# Altium PCB prosthesis.PcbDoc (part 2 of 2)
Units mm, origin at the board's own origin, x right, y up, seen from the top; angles counter-clockwise.
Board outline 54.59 x 41.87 mm, 4 copper layers (Top Layer, Layer 1, Layer 2, Bottom Layer), stack 1.575 mm thick; 80 components, 84 nets, 363 pads, 186 vias.
Unrouted connection lines stored in the file: 115.
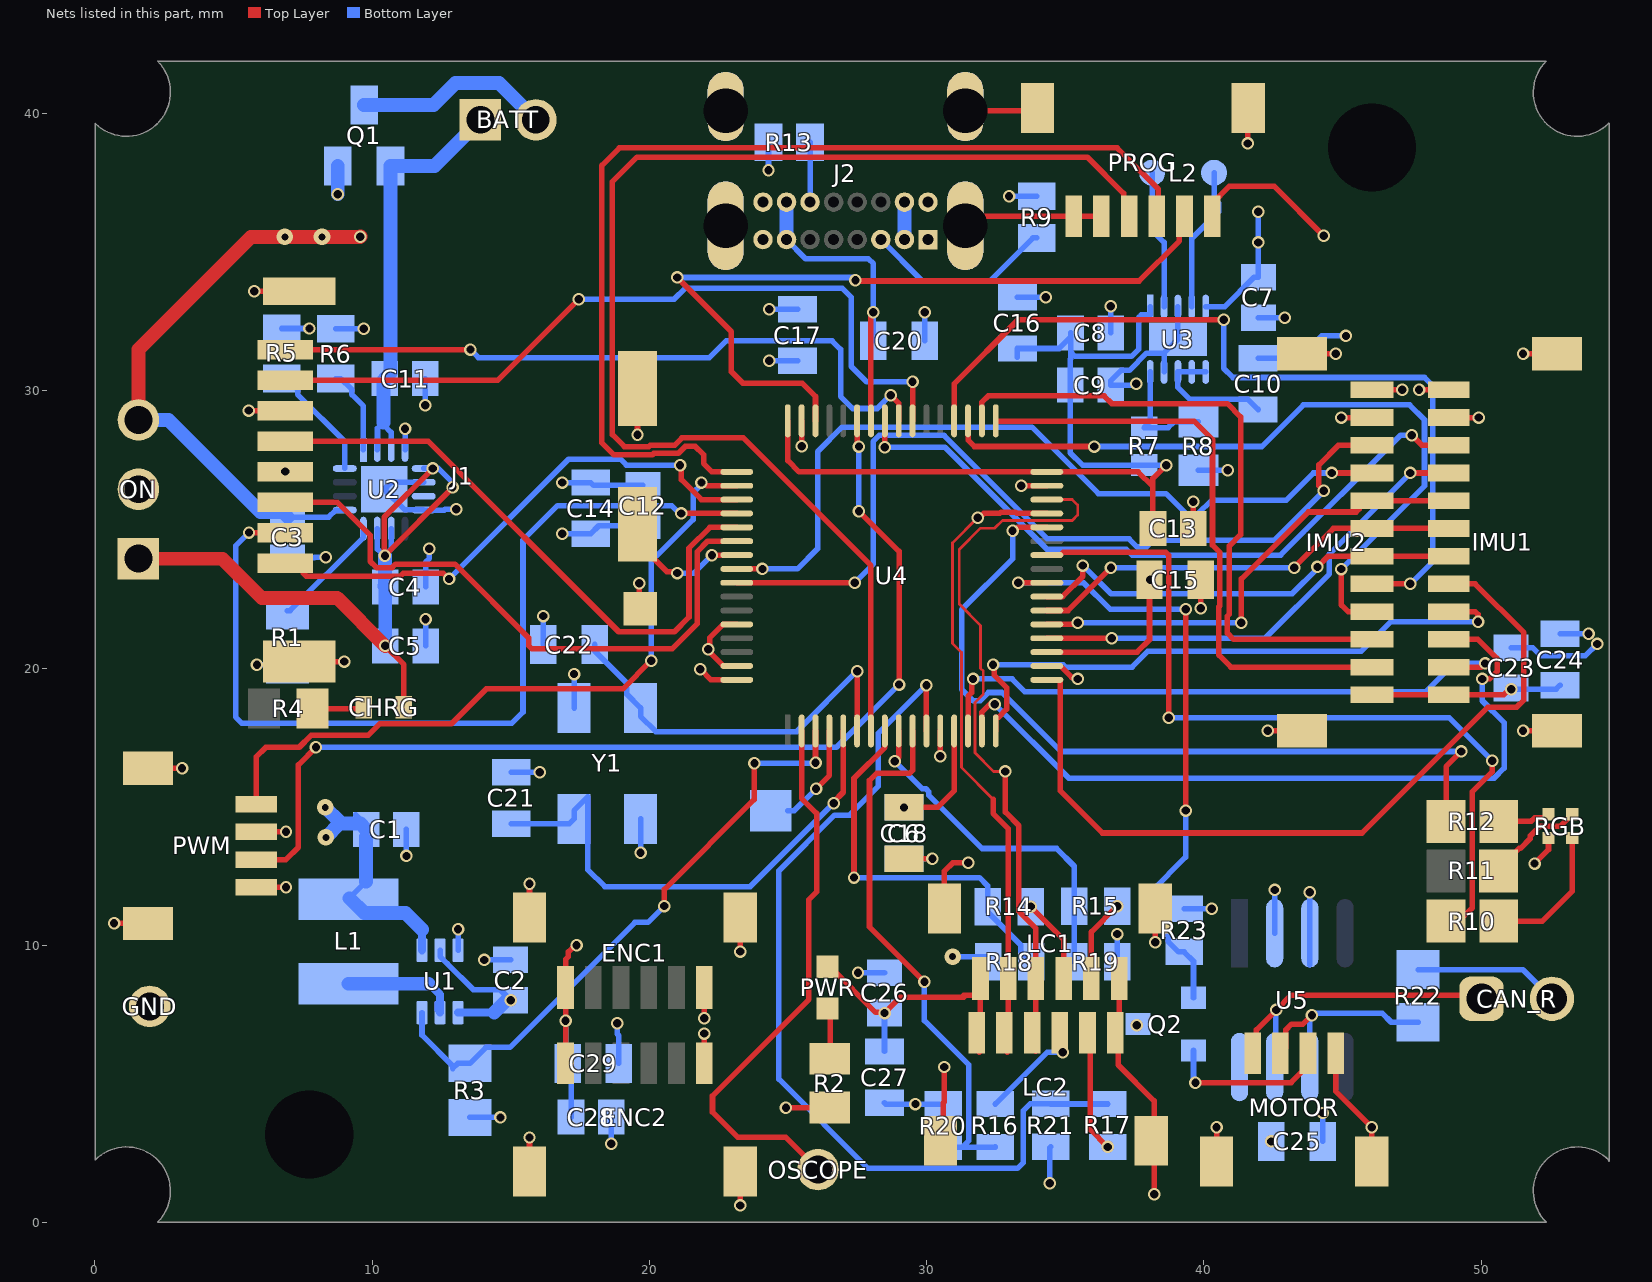
[diagram p4: the nets of this part, all layers, seen from the top]

## Via types
v1: diameter 0.45, hole 0.3, Top Layer to Bottom Layer, 181 vias
v2: diameter 0.6/0.6 (per signal layer), hole 0.25, Top Layer to Bottom Layer, 5 vias

## Nets (pads, with @x,y where several pads share a name; then routed paths per layer and width w, separated by ;. In a path a pad name is that pad's centre, name@x,y a point inside that pad or via, vN(x,y) a via of type N, cw(c..) or ccw(c..) an arc to the next point about the centre after c; other vN are vias at no path point) (continued)
GND: C1.2 C2.2 C3.2 C4.2 C5.2 C6.2 C7.2 C8.2 C9.2 C10.1 C11.2 C12.2 C13.2 C14.2 C15.2 C16.2 C17.2 C18.2 C20.2 C21.1 C22.2 C23.2 C24.2 C25.2 C26.2 C27.2 C28.2 C29.2 ENC1.6 ENC1.7 ENC1.8 ENC2.6 ENC2.7 ENC2.8 GND.1 IMU1.11 IMU1.12 IMU1.S1 IMU1.S2 IMU2.11 IMU2.12 IMU2.13 IMU2.14 J1.6 J1.9 J1.11 J1.12 J1.13 J2.1 J2.2 J2.3 J2.4 J2.A1 J2.A12 J2.B1 J2.B12 LC1.6 LC1.7 LC1.8 LC2.6 LC2.7 LC2.8 MOTOR.4 MOTOR.S1 MOTOR.S2 PROG.5 PROG.6 PROG.7 PROG.8 PWM.2 PWM.4 PWM.5 PWM.6 Q1.3 R1.2 R2.1 R3.1 R5.1 R6.1 R8.1 R9.2 R13.2 R18.1 R19.1 R20.1 R21.1 R23.1 U1.3 U2.4 U2.6 U2.8 U2.17 U3.3 U3.9 U3.11 U4.12 U4.18 U4.31 U4.47 U4.60 U4.63 U5.2 Y1.2 Y1.4 | length 130.9
  Top Layer w0.2: v1(0.696,10.793) PWM.6@1.921,10.793 ; PWM.5@1.921,16.393 v1(3.146,16.393) ; v1(5.548,29.287) J1.6@6.873,29.287 ; v1(5.748,33.587) J1.12@7.373,33.587 ; PWM.4@5.821,12.093 v1(6.896,12.093) ; PWM.2@5.821,14.093 v1(6.896,14.093) ; J1.13@7.373,20.237 v1(8.998,20.237) ; ENC2.7@15.678,1.846 v1(15.678,3.071) ; ENC1.8@15.678,11.002 v1(15.678,12.227) ; v1(19.573,28.412) J1.9@19.573,30.087 ; v1(19.641,23.062) 19.641,22.169 J1.11@19.673,22.137 ; ENC2.6@21.979,5.746 v1(21.979,6.821) ; v1(21.979,7.377) ENC1.6@21.979,8.477 ; U4.63@23.152,20.077 22.667,20.077 22.13,20.614 v1(22.13,20.677) 22.177,20.725 22.177,21.09 22.664,21.577 U4.60@23.152,21.577 ; v1(23.278,0.621) ENC2.8@23.278,1.846 ; v1(23.278,9.777) ENC1.7@23.278,11.002 ; v1(24.927,4.15) R2.1@26.51,4.15 ; v1(25.493,27.999) U4.47@25.493,28.918 ; C6.2@29.185,13.125 v1(30.21,13.125) ; v1(30.493,16.816) U4.12@30.493,17.735 ; LC2.7@30.604,2.244 30.604,4.323 30.632,4.351 v1(30.632,5.614) ; LC1.8@30.642,11.333 30.642,12.675 30.942,12.976 v1(31.496,12.976) ; J2.1@31.393,35.953 31.393,36.064 31.624,36.295 PROG.6@35.301,36.295 PROG.5@36.301,36.295 ; J2.3@31.393,40.103 33.909,40.103 PROG.8@34.001,40.195 ; v1(33.415,26.577) U4.31@34.334,26.577 ; U4.18@34.334,20.077 34.822,20.077 35.242,19.657 35.399,19.657 v1(35.446,19.609) ; LC1.6@36.942,8.808 36.942,6.181 36.905,6.144 36.905,5.694 38.205,4.394 v1(38.205,1.019) ; v1(38.242,10.108) LC1.7@38.242,11.333 ; C13.2@39.617,25.04 v1(39.617,25.996) ; v1(39.888,22.161) C15.2@39.888,23.186 ; MOTOR.S2@40.456,2.211 v1(40.456,3.436) ; v1(41.577,38.92) 41.577,40.171 PROG.7@41.601,40.195 ; v1(42.306,17.736) IMU2.14@43.531,17.736 ; IMU2.13@43.531,31.336 v1(44.756,31.336) ; MOTOR.4@44.756,6.111 44.756,4.736 v1(46.056,3.436) MOTOR.S1@46.056,2.211 ; v1(44.956,29.036) IMU2.11@46.056,29.036 ; IMU2.12@46.056,30.036 v1(47.156,30.036) ; v1(47.759,30.036) IMU1.12@48.834,30.036 ; IMU1.11@48.834,29.036 v1(49.909,29.036) ; v1(51.509,17.736) IMU1.S2@52.734,17.736 ; v1(51.509,31.336) IMU1.S1@52.734,31.336
  Bottom Layer w0.2: v1(5.848,20.12) R1.2@6.948,20.12 ; R5.1@6.743,32.247 v1(7.743,32.247) ; C3.2@6.96,23.987 7.912,23.987 7.928,24.003 v1(8.333,24.003) ; R6.1@8.695,32.242 v1(9.695,32.242) ; U2.4@11.189,27.872 v1(11.189,28.63) ; v1(11.239,13.226) C1.2@11.239,14.182 ; U2.6@11.862,26.699 10.689,26.699 U2.17@10.439,26.449 11.182,25.707 11.855,25.707 U2.8@11.862,25.699 12.609,25.699 12.64,25.73 v1(13.038,25.73) ; v1(11.92,29.482) C11.2@11.92,30.439 ; C5.2@11.929,20.803 v1(11.929,21.759) ; C4.2@11.929,22.926 11.929,23.819 12.065,23.955 v1(12.065,24.3) ; U1.3@13.102,9.828 v1(13.102,10.578) ; R3.1@13.531,3.794 v1(14.631,3.794) ; v1(14.046,9.475) C2.2@15.002,9.475 ; C21.1@15.02,16.24 v1(16.045,16.24) ; C22.2@16.179,20.85 v1(16.179,21.875) ; v1(16.859,24.841) C14.2@17.884,24.841 18.176,25.133 C12.2@19.765,25.133 ; Y1.2@17.285,18.561 v1(17.285,19.786) ; v1(18.63,2.852) C28.2@18.63,3.808 ; v1(18.84,7.186) 18.84,6.804 18.902,6.742 C29.2@18.902,5.744 ; v1(19.685,13.336) Y1.4@19.685,14.561 ; v1(24.298,37.958) R13.2@24.298,38.958 ; v1(24.323,32.937) C17.2@25.348,32.937 ; v1(27.525,9.015) C26.2@28.481,9.015 ; C27.2@28.481,4.325 28.529,4.277 v1(29.597,4.277) R20.1@30.597,4.277 ; C18.2@29.185,13.125 v1(30.21,13.125) ; C20.2@29.928,31.805 v1(29.928,32.83) ; v2(30.937,9.594) R18.1@32.226,9.594 ; R18.1@32.226,9.408 R18.1@32.226,9.594 ; v1(32.973,37.013) R9.2@33.973,37.013 ; C16.2@33.275,33.376 v1(34.3,33.376) ; v1(34.442,1.419) 34.442,2.707 R21.1@34.47,2.735 ; C8.2@36.644,32.088 v1(36.644,33.044) ; R19.1@36.875,9.408 v1(36.875,10.408) ; v1(37.563,30.251) 37.519,30.208 C9.2@36.635,30.208 36.635,30.36 37.013,30.739 37.31,30.739 37.931,31.36 U3.11@38.562,31.36 ; U3.9@38.563,30.682 U3.11@38.563,31.36 ; U3.3@39.062,33.038 U3.11@39.062,31.86 U3.11@38.563,31.36 ; R23.1@39.286,11.316 v1(40.286,11.316) ; R8.1@39.804,27.134 v1(40.854,27.134) ; C10.1@41.952,31.176 43.444,31.176 44.246,31.979 v1(45.122,31.979) ; C7.2@41.962,32.64 v1(42.918,32.64) ; U5.2@42.552,10.439 v1(42.552,11.998) ; C25.2@44.283,2.93 v1(44.283,3.955) ; C23.2@51.084,20.736 51.856,20.736 52.145,20.447 53.759,20.447 v1(54.184,20.872) ; C24.2@52.847,21.234 v1(53.873,21.234) ; R18.1@32.226,9.594 32.24,9.594 32.226,9.608 R18.1@32.226,9.594
  Bottom Layer w0.5: v1(8.764,37.087) Q1.3@8.764,38.112
GRN: R10.1 U4.26 | length 29.4
  Top Layer w0.2: U4.26@34.334,24.077 34.826,24.077 34.93,24.181 38.618,24.181 38.735,24.064 v1(38.735,18.212) ; R10.1@48.736,10.875 49.2,10.875 49.682,11.357 49.682,15.545 50.394,16.256 v1(50.394,16.662)
  Bottom Layer w0.2: v1(38.735,18.212) 48.844,18.212 v1(50.394,16.662)
IMU0_BT: IMU1.2 U4.14 | length 22.4
  Top Layer w0.2: U4.14@31.493,17.735 31.493,18.984 31.626,19.117 31.626,19.561 v1(31.674,19.609) ; IMU1.2@48.834,20.036 50.008,20.036 v1(50.14,20.168)
  Bottom Layer w0.2: v1(31.674,19.609) 33.08,19.609 33.537,19.152 48.006,19.152 49.022,20.168 v1(50.14,20.168)
IMU0_CS: IMU1.9 U4.20 | length 17.4
  Top Layer w0.2: U4.20@34.334,21.077 v1(36.672,21.077) ; v1(47.447,27.036) IMU1.9@48.834,27.036
  Bottom Layer w0.2: v1(36.672,21.077) 42.207,21.077 44.526,23.396 44.526,24.115 v1(47.447,27.036)
IMU0_INT: IMU1.10 U4.41 | length 24.8
  Top Layer w0.2: v1(28.493,27.965) U4.41@28.493,28.918 ; v1(47.498,28.397) 47.859,28.036 IMU1.10@48.834,28.036
  Bottom Layer w0.2: v1(28.493,27.965) 30.656,27.965 34.335,24.287 37.196,24.287 37.41,24.073 42.767,24.073 47.092,28.397 v1(47.498,28.397)
IMU0_P0: IMU1.3 U4.15 | length 27.6
  Top Layer w0.2: U4.15@31.993,17.735 31.993,18.415 32.273,18.694 v1(32.461,18.694) ; IMU1.3@48.834,21.036 49.88,21.036 50.571,20.345 50.571,19.878 50.302,19.609 v1(50.038,19.609)
  Bottom Layer w0.2: v1(32.461,18.694) 35.128,16.027 50.463,16.027 50.825,16.39 50.825,18.034 50.038,18.821 v1(50.038,19.609)
IMU0_P1: IMU1.4 U4.16 | length 22.4
  Top Layer w0.2: v1(32.395,20.125) 32.443,20.077 32.443,19.738 32.886,19.295 32.886,18.518 32.594,18.226 32.499,18.226 32.493,18.22 U4.16@32.493,17.735 ; IMU1.4@48.834,22.036 49.784,22.036 49.886,21.935 v1(49.886,21.666)
  Bottom Layer w0.2: v1(32.395,20.125) 34.923,20.125 35.012,20.036 37.41,20.036 37.973,20.599 45.669,20.599 46.736,21.666 v1(49.886,21.666)
IMU0_RST: IMU1.5 U4.17 | length 29.7
  Top Layer w0.2: U4.17@34.334,19.577 34.823,19.577 34.823,15.57 36.341,14.053 45.701,14.053 50.241,18.593 51.283,18.593 51.537,18.847 51.537,21.284 49.784,23.036 IMU1.5@48.834,23.036
IMU1_BT: IMU2.2 U4.33 | length 21.7
  Top Layer w0.2: U4.33@32.493,28.918 32.493,28.905 39.649,28.905 40.31,28.245 40.31,24.435 40.564,24.181 40.564,22.239 40.538,22.214 40.538,20.472 40.974,20.036 IMU2.2@46.056,20.036
IMU1_CS: IMU2.9 U4.56 | length 29
  Top Layer w0.2: U4.56@23.152,23.577 v1(24.079,23.577) ; v1(44.613,27.036) IMU2.9@46.056,27.036
  Bottom Layer w0.2: v1(24.079,23.577) 25.339,23.577 26.073,24.311 26.073,27.812 26.951,28.69 33.794,28.69 36.195,26.289 38.633,26.289 39.37,25.552 39.776,25.552 40.284,26.06 42.972,26.06 43.948,27.036 v1(44.613,27.036)
IMU1_INT: IMU2.10 U4.57 | length 31.7
  Top Layer w0.2: U4.57@23.152,23.077 v1(27.407,23.077) ; v1(44.323,26.391) 44.145,26.568 44.145,27.33 44.851,28.036 IMU2.10@46.056,28.036
  Bottom Layer w0.2: v1(27.407,23.077) 28.067,23.737 28.067,28.169 28.289,28.39 30.627,28.39 34.354,24.663 37.301,24.663 37.592,24.373 37.934,24.373 38.176,24.615 42.547,24.615 v1(44.323,26.391)
IMU1_P0: IMU2.3 U4.34 | length 23.7
  Top Layer w0.2: U4.34@31.993,28.918 31.993,29.591 32.222,29.82 36.398,29.82 36.678,29.54 40.843,29.54 41.326,29.058 41.326,24.816 40.919,24.409 40.919,21.946 40.85,21.876 40.85,21.26 41.073,21.036 IMU2.3@46.056,21.036
IMU1_P1: IMU2.4 U4.35 | length 27.2
  Top Layer w0.2: U4.35@31.493,28.918 31.493,28.222 31.725,27.991 v1(36.043,27.991) ; v1(44.958,23.571) 44.958,22.276 45.197,22.036 IMU2.4@46.056,22.036
  Bottom Layer w0.2: v1(36.043,27.991) 42.088,27.991 43.586,29.489 47.422,29.489 47.955,28.956 47.955,26.568 v1(44.958,23.571)
IMU1_RST: IMU2.5 U4.36 | length 30.4
  Top Layer w0.2: U4.36@30.993,28.918 30.993,30.251 33.305,32.563 v1(40.716,32.563) ; IMU2.5@46.056,23.036 v1(47.447,23.036)
  Bottom Layer w0.2: v1(40.716,32.563) 40.716,30.81 41.046,30.48 47.955,30.48 48.26,30.175 48.26,23.849 v1(47.447,23.036)
IMU_MISO: IMU1.7 IMU2.7 U4.22 | length 15.7
  Top Layer w0.2: U4.22@34.334,22.077 35.103,22.077 v1(36.648,23.622) ; v1(43.256,23.622) 44.671,25.036 IMU2.7@46.056,25.036 IMU1.7@48.834,25.036
  Bottom Layer w0.2: v1(36.648,23.622) v1(43.256,23.622)
IMU_MOSI: IMU1.6 IMU2.6 U4.23 | length 16.2
  Top Layer w0.2: U4.23@34.334,22.577 34.9,22.577 35.636,23.313 v1(35.636,23.698) ; v1(44.094,23.647) 44.483,24.036 IMU2.6@46.056,24.036 IMU1.6@48.834,24.036
  Bottom Layer w0.2: v1(35.636,23.698) 36.652,22.682 43.183,22.682 44.094,23.593 v1(44.094,23.647)
IMU_SCL: IMU1.8 IMU2.8 U4.21 | length 17.4
  Top Layer w0.2: U4.21@34.334,21.577 35.382,21.577 v1(35.446,21.641) ; v1(41.351,21.641) 41.351,23.216 43.765,25.63 45.493,25.63 45.593,25.73 45.593,26.036 IMU2.8@46.056,26.036 IMU1.8@48.834,26.036
  Bottom Layer w0.2: v1(35.446,21.641) v1(41.351,21.641)
LC1_A0: LC1.4 R14.2 | length 3.1
  Top Layer w0.2: v1(33.753,11.401) 34.942,10.213 LC1.4@34.942,8.808
LC1_A0_D2: R14.1 R18.2 U4.8 | length 14.1
  Top Layer w0.2: v1(27.381,12.446) 27.381,16.027 28.493,17.139 U4.8@28.493,17.735
  Bottom Layer w0.2: v1(27.381,12.446) 31.902,12.446 32.203,12.145 R14.1@32.203,11.401 32.203,11.201 33.401,10.004 33.401,9.783 R18.2@33.776,9.408
LC1_A1: LC1.5 R15.2 | length 3
  Top Layer w0.2: LC1.5@35.942,8.808 35.942,10.483 v1(36.873,11.415)
LC1_A1_D2: R15.1 R19.2 U4.9 | length 12.7
  Top Layer w0.2: v1(28.854,16.637) 28.993,16.776 U4.9@28.993,17.735
  Bottom Layer w0.2: v1(28.854,16.637) 29.841,15.65 29.967,15.65 30.085,15.533 30.085,15.407 31.998,13.493 34.685,13.493 35.323,12.855 R15.1@35.323,11.415 R19.2@35.325,9.408 R19.2@35.325,9.408
LC2_A0: LC2.4 R16.2 | length 3.2
  Bottom Layer w0.2: R16.2@32.48,4.28 34.345,6.144 v1(34.905,6.144)
LC2_A0_D2: R16.1 R20.2 U4.10 | length 19.8
  Top Layer w0.2: U4.10@29.493,17.735 29.493,16.31 29.388,16.205 28.194,16.205 27.94,15.951 27.94,10.668 v1(29.921,8.687)
  Bottom Layer w0.2: v1(29.921,8.687) 29.921,7.29 31.521,5.69 31.521,2.956 31.293,2.727 ; R20.2@30.597,2.727 31.293,2.727 ; R16.1@32.48,2.73 32.477,2.727 31.293,2.727
LC2_A1: LC2.5 R17.2 | length 3.7
  Top Layer w0.2: LC2.5@35.905,6.144 35.905,3.355 v1(36.53,2.73)
LC2_A1_D2: R17.1 R21.2 U4.11 | length 33.6
  Top Layer w0.2: U4.11@29.993,17.735 v1(29.993,19.383)
  Bottom Layer w0.2: v1(29.993,19.383) 28.261,17.652 28.261,15.741 27.22,14.7 26.68,14.7 24.67,12.69 24.67,5.175 27.889,1.956 33.274,1.956 33.477,2.159 33.477,4.031 33.731,4.285 R21.2@34.47,4.285 34.474,4.28 R17.1@36.53,4.28
NetBATT1_1: BATT.1 C11.1 Q1.1 U2.2 U2.3 | length 15
  Bottom Layer w0.2: U2.2@10.189,27.872 10.189,28.148 10.197,28.155 10.197,28.221 10.197,28.647 10.326,28.776 ; 10.407,28.787 10.689,28.504 U2.3@10.689,28.271 ; 10.407,28.855 10.474,28.855 ; C11.1@10.466,30.439 C11.1@10.664,30.637
  Bottom Layer w0.5: 10.407,28.855 10.407,30.379 C11.1@10.466,30.439 ; C11.1@10.664,30.637 Q1.1@10.664,38.112 12.249,38.112 BATT.1@13.908,39.771
NetBATT1_2: BATT.2 Q1.2 | length 7.1
  Bottom Layer w0.5: Q1.2@9.714,40.312 12.223,40.312 13.008,41.097 14.582,41.097 BATT.2@15.908,39.771
NetC4_1: C4.1 C5.1 CHRG.1 ON.1 U2.5 U2.10 U2.11 | length 26.9
  Top Layer w0.2: v1(10.474,20.803) 11.149,20.128 CHRG.1@11.149,18.588 ; v1(12.193,27.199) 10.439,25.446 10.439,24.078 v1(10.466,24.052) 10.466,24.066 12.903,26.503 v1(12.903,26.518)
  Top Layer w0.5: ON.1@1.575,23.941 4.61,23.941 6.022,22.53 8.747,22.53 v1(10.474,20.803)
  Bottom Layer w0.2: U2.11@10.189,25.026 10.189,24.293 10.431,24.052 v1(10.466,24.052) 10.466,24.069 10.689,24.293 U2.10@10.689,25.026 ; C4.1@10.439,22.961 C4.1@10.474,22.926 ; U2.5@11.862,27.199 v1(12.193,27.199) 12.395,27.199 12.903,26.691 v1(12.903,26.518)
  Bottom Layer w0.5: C4.1@10.439,22.961 10.466,22.987 v1(10.466,24.052) ; v1(10.474,20.803) C4.1@10.474,22.926
NetC10_2: C10.2 U3.6 U3.7 U3.8 | length 4.8
  Bottom Layer w0.2: U3.6@40.062,30.682 U3.7@39.563,30.682 U3.8@39.062,30.682 39.062,30.121 39.482,29.701 41.577,29.701 C10.2@41.952,29.326
NetC21_2: C21.2 U4.5 Y1.1 | length 19.1
  Top Layer w0.2: v1(26.648,15.125) 26.648,15.178 26.993,15.523 U4.5@26.993,17.735
  Bottom Layer w0.2: C21.2@15.02,14.39 17.113,14.39 Y1.1@17.285,14.561 17.285,14.861 17.785,15.361 17.785,12.725 18.394,12.116 23.639,12.116 v1(26.648,15.125)
NetC22_1: C22.1 U4.6 Y1.3 | length 14.4
  Top Layer w0.2: U4.6@27.493,17.735 v1(27.493,19.888)
  Bottom Layer w0.2: C22.1@18.029,20.85 18.029,20.625 19.185,19.47 19.185,19.061 Y1.3@19.685,18.561 19.685,18.261 20.235,17.711 25.316,17.711 v1(27.493,19.888)
NetCHRG_2: CHRG.2 R4.2 | length 1.9
  Top Layer w0.2: R4.2@7.858,18.539 9.649,18.539 CHRG.2@9.699,18.588
NetJ2_A5: J2.A5 R9.1 | length 6.9
  Bottom Layer w0.2: J2.A5@28.348,35.453 29.841,33.96 32.283,33.96 33.836,35.513 R9.1@33.973,35.513
NetJ2_B5: J2.B5 R13.1 | length 2.2
  Bottom Layer w0.2: 25.798,37.872 R13.1@25.798,38.958 ; J2.B5@25.798,36.803 25.798,37.871
NetJ3_1: CAN_R.1 MOTOR.1 U5.7 | length 11.6
  Top Layer w0.1: MOTOR.1@41.756,6.111 MOTOR.1@41.896,6.251
  Top Layer w0.2: MOTOR.1@41.896,6.251 41.896,6.952 v1(42.614,7.671) 43.148,8.204 CAN_R.1@49.95,8.204
  Bottom Layer w0.1: U5.7@42.552,5.612 U5.7@42.583,5.643 ; v1@42.583,7.639 v1(42.614,7.671)
  Bottom Layer w0.2: U5.7@42.583,5.643 v1@42.583,7.639
NetJ3_2: CAN_R.2 R22.1 | length 5.3
  Bottom Layer w0.2: R22.1@47.725,9.128 51.499,9.128 CAN_R.2@52.553,8.075
NetL1_2: L1.2 U1.5 | length 4.5
  Bottom Layer w0.2: U1.5@12.352,7.906 12.352,7.678 U1.5@12.452,7.578
  Bottom Layer w0.3: 12.065,8.617 12.452,8.229 U1.5@12.452,7.578
  Bottom Layer w0.5: L1.2@9.155,8.617 12.039,8.617
NetL2_1: L2.1 U3.4 | length 5.3
  Bottom Layer w0.2: U3.4@39.563,33.038 39.563,35.497 40.529,36.463 40.529,36.763 40.366,36.926 L2.1@40.366,37.864
NetL2_2: L2.2 U3.2 | length 5
  Bottom Layer w0.2: L2.2@38.135,37.864 38.135,35.778 38.563,35.35 U3.2@38.563,33.038
NetMOTOR_2: MOTOR.2 R22.2 U5.6 | length 8
  Top Layer w0.2: MOTOR.2@42.756,6.111 42.956,6.311 42.956,6.956 43.159,7.159 43.569,7.159 v1(43.896,7.486)
  Bottom Layer w0.2: U5.6@43.822,5.612 43.822,7.412 v1(43.896,7.486) 43.97,7.56 46.425,7.56 46.757,7.228 R22.2@47.725,7.228
NetMOTOR_3: MOTOR.3 Q2.2 | length 6
  Top Layer w0.2: v1(39.695,5.049) 43.144,5.049 43.756,5.661 MOTOR.3@43.756,6.111
  Bottom Layer w0.2: Q2.2@39.624,6.209 39.624,5.119 v1(39.695,5.049)
NetOSC_1: OSCOPE.1 U4.2 | length 20.2
  Top Layer w0.2: U4.2@25.493,17.735 25.493,15.299 26.035,14.757 26.035,11.931 25.756,11.651 25.756,8.052 22.279,4.575 22.279,3.985 23.19,3.073 24.927,3.073 OSCOPE.1@26.086,1.915
NetPWR_1: PWR.1 R2.2 | length 2.4
  Top Layer w0.2: PWR.1@26.528,7.971 26.528,5.573 R2.2@26.535,5.566
NetR1_1: R1.1 U2.12 | length 4.2
  Bottom Layer w0.2: R1.1@6.948,22.07 7.048,22.07 9.689,24.711 U2.12@9.689,25.026
NetR5_2: R5.2 U2.16 | length 4.3
  Bottom Layer w0.2: R5.2@6.743,30.447 6.918,30.447 7.318,30.047 7.318,29.872 9.016,28.174 U2.16@9.016,27.199
NetR6_2: R6.2 U2.1 | length 3.1
  Bottom Layer w0.2: R6.2@8.695,30.442 8.87,30.442 9.27,30.042 9.27,29.867 9.689,29.447 U2.1@9.689,27.872
NetR7_1: R7.1 R8.2 U3.10 | length 4.2
  Bottom Layer w0.2: U3.10@38.062,30.682 38.062,28.888 R7.1@37.843,28.669 38.71,28.669 38.925,28.884 R8.2@39.804,28.884
NetR10_2: R10.2 RGB.4 | length 5
  Top Layer w0.2: R10.2@50.636,10.875 52.206,10.875 53.277,11.946 RGB.4@53.277,13.873
NetR11_2: R11.2 RGB.3 | length 3.6
  Top Layer w0.2: R11.2@50.626,12.686 50.626,12.761 51.366,13.501 51.417,13.501 51.768,13.852 51.768,13.946 52.12,14.298 52.852,14.298 RGB.3@53.277,14.723
NetR12_2: R12.2 RGB.2 | length 1.9
  Top Layer w0.2: R12.2@50.634,14.476 51.802,14.476 51.924,14.598 52.302,14.598 RGB.2@52.427,14.723
PC15: pad.5 U4.4 | length 3.6
  Top Layer w0.2: v1(26.011,15.646) 26.493,16.128 U4.4@26.493,17.735
  Bottom Layer w0.2: pad.5@24.994,14.861 25.226,14.861 v1(26.011,15.646)
PGOOD: U2.7
PWM0: PWM.1 U4.50 | length 25.9
  Top Layer w0.2: PWM.1@5.821,15.093 5.821,16.798 6.168,17.145 7.375,17.145 7.8,17.57 9.855,17.57 10.273,17.988 12.855,17.988 14.119,19.252 19.049,19.252 v1(20.066,20.269) ; v1(21.879,26.691) 21.946,26.691 22.061,26.577 U4.50@23.152,26.577
  Bottom Layer w0.2: v1(20.066,20.269) 20.066,23.84 21.579,25.352 21.579,26.324 21.879,26.624 v1(21.879,26.691)
PWM1: PWM.3 U4.43 | length 37.7
  Top Layer w0.2: PWM.3@5.821,13.093 6.895,13.093 7.341,13.538 7.341,16.51 v1(7.976,17.145) ; U4.43@27.493,28.918 27.493,28.057 v1(27.559,27.991) ; v1(27.559,25.654) 29.007,24.206 v1(29.007,19.406)
  Bottom Layer w0.2: v1(7.976,17.145) 26.746,17.145 v1(29.007,19.406) ; v1(27.559,25.654) v1(27.559,27.991)
RED: R12.1 U4.28 | length 29.7
  Top Layer w0.2: v1(33.1,24.949) 33.167,24.949 33.295,25.077 U4.28@34.334,25.077 ; R12.1@48.734,14.476 48.734,16.451 v1(49.276,16.993)
  Bottom Layer w0.2: v1(33.1,24.949) 33.1,23.938 31.267,22.106 31.267,19.228 31.674,18.821 31.928,18.821 32.226,19.119 32.715,19.119 34.842,16.993 v1(49.276,16.993)
RST: PROG.4 U4.7 | length 47.2
  Top Layer w0.2: U4.7@27.993,17.735 27.993,23.698 27.485,24.206 23.39,28.302 21.176,28.302 20.919,28.044 20.038,28.044 19.981,27.987 19.101,27.987 18.669,28.419 18.669,37.541 19.558,38.43 35.793,38.43 37.101,37.122 37.101,36.109 PROG.4@37.223,35.988
SCL2: LC1.2 LC2.2 U4.29 | length 23.1
  Top Layer w0.1: v1(31.84,25.42) 30.937,24.517 30.937,20.884 31.254,20.567 31.254,16.411 32.395,15.269
  Top Layer w0.2: v1(31.84,25.42) 31.908,25.42 32.064,25.577 32.635,25.577 32.685,25.627 33.203,25.627 33.253,25.577 U4.29@34.334,25.577 ; 32.395,15.269 32.395,14.76 32.942,14.213 32.942,13.739 ; LC2.2@32.905,6.144 32.942,6.181 LC1.2@32.942,8.808 32.942,13.739 ; 32.944,13.741 32.942,13.739
SDA2: LC1.3 LC2.3 U4.30 | length 26.1
  Top Layer w0.1: v1(32.837,16.271) 32.419,16.271 31.742,16.948 31.742,18.762 32.046,19.067 32.046,19.888 31.943,19.991 31.943,21.541 31.175,22.309 31.175,24.283 31.937,25.045 32.457,25.045 32.737,25.325 35.251,25.325 35.446,25.52 35.446,25.879 35.248,26.077 U4.30@34.334,26.077
  Top Layer w0.2: v1(32.837,16.271) 32.837,14.806 33.328,14.315 33.328,11.225 33.942,10.612 LC1.3@33.942,8.808 LC2.3@33.942,6.181
SDMMC_CD: J1.10 U4.55 | length 5
  Top Layer w0.2: J1.10@19.573,25.187 19.573,24.537 20.636,23.474 20.958,23.474 v1(21.006,23.426) ; v1(22.258,24.073) 22.259,24.074 23.149,24.074 U4.55@23.152,24.077
  Bottom Layer w0.2: v1(21.006,23.426) 21.612,23.426 v1(22.258,24.073)
SDMMC_CK: J1.5 U4.53 | length 22.1
  Top Layer w0.2: J1.5@6.873,28.187 12.021,28.187 18.898,21.311 20.904,21.311 21.431,21.837 21.431,24.326 22.181,25.077 U4.53@23.152,25.077
SDMMC_CMD: J1.3 U4.54 | length 22.4
  Top Layer w0.2: J1.3@6.873,25.987 8.738,25.987 9.931,24.793 9.931,23.852 10.16,23.624 10.725,23.624 10.851,23.749 12.992,23.749 15.646,21.094 15.646,20.811 15.764,20.694 20.821,20.694 21.731,21.604 21.731,24.201 22.106,24.577 U4.54@23.152,24.577
SDMMC_D0: J1.7 U4.39 | length 28.3
  Top Layer w0.2: J1.7@6.873,30.387 14.537,30.387 v1(17.457,33.306) ; U4.39@29.493,28.918 v1(29.493,30.328)
  Bottom Layer w0.2: v1(17.457,33.306) 20.897,33.306 21.297,33.706 26.949,33.706 27.28,33.376 27.28,30.886 27.838,30.328 v1(29.493,30.328)
SDMMC_D1: J1.8 U4.40 | length 25.5
  Top Layer w0.2: J1.8@6.873,31.487 v1(13.547,31.487) ; v1(28.702,29.845) 28.993,29.554 U4.40@28.993,28.918
  Bottom Layer w0.2: v1(13.547,31.487) 13.836,31.198 22.167,31.198 22.77,31.801 26.594,31.801 26.899,31.496 26.899,29.794 27.33,29.362 28.219,29.362 v1(28.702,29.845)
SDMMC_D2: J1.1 U4.51 | length 19.5
  Top Layer w0.2: J1.1@6.873,23.787 7.518,23.787 7.518,23.425 7.626,23.317 11.019,23.317 11.128,23.426 12.565,23.426 v1(12.776,23.216) ; v1(21.107,27.319) 21.155,27.271 21.155,26.8 21.879,26.077 U4.51@23.152,26.077
  Bottom Layer w0.2: v1(12.776,23.216) 17.094,27.534 18.96,27.534 19.174,27.319 v1(21.107,27.319)
SDMMC_D3: J1.2 U4.52 | length 33.3
  Top Layer w0.2: v1(5.563,24.887) J1.2@6.873,24.887 ; v1(21.154,25.577) U4.52@23.152,25.577
  Bottom Layer w0.2: v1(5.563,24.887) 5.08,24.404 5.08,18.237 5.309,18.009 15.037,18.009 15.443,18.415 15.443,24.613 16.688,25.857 20.805,25.857 21.086,25.577 v1(21.154,25.577)
STO: Q2.1 R23.2 U4.24 | length 22.7
  Top Layer w0.2: v1(33.305,23.077) U4.24@34.334,23.077 ; v1(39.339,14.861) v1(39.339,22.123)
  Bottom Layer w0.2: v1(33.305,23.077) 35.667,23.077 36.62,22.123 v1(39.339,22.123) ; v1(39.339,14.861) 39.339,13.183 38.103,11.946 38.103,10.949 38.711,10.341 38.711,10.141 39.086,9.766 R23.2@39.286,9.766 39.624,9.427 Q2.1@39.624,8.109
SWCLK: PROG.3 U4.49 | length 38.1
  Top Layer w0.2: U4.49@23.152,27.077 22.258,27.077 21.955,27.379 21.955,27.699 21.652,28.002 21.3,28.002 21.043,27.744 20.163,27.744 20.105,27.687 18.72,27.687 18.288,28.119 18.288,38.125 18.923,38.76 36.87,38.76 38.36,37.27 PROG.3@38.36,35.915
SWDIO: PROG.2 U4.46 | length 28.3
  Top Layer w0.2: v1(21.006,34.087) 22.962,32.131 22.962,30.686 23.368,30.28 25.507,30.28 25.993,29.794 U4.46@25.993,28.918 ; v1(27.432,33.985) 27.457,33.96 37.666,33.96 39.114,35.408 39.114,36.241 PROG.2@39.301,36.428
  Bottom Layer w0.2: v1(21.006,34.087) 27.33,34.087 v1(27.432,33.985)
V3.3: C6.1 C8.1 C9.1 C12.1 C13.1 C14.1 C15.1 C16.1 C17.1 C18.1 C23.1 C24.1 C25.1 C28.1 C29.1 ENC1.1 ENC2.1 IMU1.1 IMU2.1 J1.4 PROG.1 R7.2 RGB.1 U3.1 U4.13 U4.19 U4.32 U4.48 U4.64 U5.3 U5.8 | length 72.3
  Top Layer w0.2: ENC2.1@16.979,5.746 v1(16.979,7.277) ENC1.1@16.979,8.477 16.979,9.494 17.079,9.594 17.079,9.767 17.316,10.004 v1(17.376,10.004) ; v1(21.839,19.96) 22.222,19.577 U4.64@23.152,19.577 ; U4.48@24.993,28.918 24.993,27.483 25.4,27.077 U4.32@34.334,27.077 37.63,27.077 38.163,26.543 ; C6.1@29.18,14.979 v1(29.185,14.975) 30.398,14.975 30.993,15.57 U4.13@30.993,17.735 ; U4.19@34.334,20.577 37.592,20.577 38.038,21.023 C15.1@38.038,23.186 v1(38.062,23.186) ; C13.1@38.163,25.04 38.163,26.543 ; v1(38.643,27.319) 38.163,26.839 38.163,26.543 ; PROG.1@40.301,36.295 40.301,36.758 40.912,37.369 42.543,37.369 v1(44.323,35.589) ; IMU2.1@46.056,19.036 IMU1.1@48.834,19.036 50.812,19.036 51.016,19.24 v1(51.084,19.24) ; v1(51.924,12.95) 52.427,13.453 RGB.1@52.427,13.873
  Bottom Layer w0.2: v1(16.859,26.691) C14.1@17.884,26.691 17.988,26.588 C12.1@19.765,26.588 ; v1(16.979,7.277) 16.979,5.817 C29.1@17.052,5.744 17.176,5.619 C28.1@17.176,3.808 ; v1(24.323,31.087) C17.1@25.348,31.087 ; C16.1@33.264,31.212 33.264,31.526 C16.1@33.275,31.526 34.78,31.526 C8.1@35.19,31.936 ; C8.1@35.19,32.088 C8.1@35.19,31.936 ; U3.1@38.062,33.038 38.062,32.741 37.744,32.741 37.643,32.639 37.643,31.496 37.389,31.242 35.357,31.242 35.19,31.409 ; v1(38.643,27.319) R7.2@37.843,27.319 35.623,27.319 35.18,27.762 C9.1@35.18,30.208 35.18,31.14 35.19,31.15 35.19,31.409 ; U5.3@43.822,9.303 U5.3@43.822,10.439 v1(43.822,11.915) ; v1(51.084,19.24) 52.704,19.24 C24.1@52.847,19.384 ; 35.19,31.409 C8.1@35.19,31.936
  other v1: 42.433,2.93 6.873,27.087
V5: C2.1 C26.1 C27.1 LC1.1 LC2.1 PWR.2 Q2.3 U1.2 U1.4 | length 16.1
  Top Layer w0.2: PWR.2@26.528,9.221 28.164,7.585 28.457,7.585 v1(28.481,7.56) 29.054,8.133 31.338,8.133 31.338,8.204 31.725,8.204 31.742,8.133 LC1.1@31.942,8.333 ; LC2.1@31.905,6.144 31.905,6.171 31.901,6.175 31.942,6.216 LC1.1@31.942,8.333 ; LC1.1@31.942,8.683 LC1.1@31.942,8.333
  Bottom Layer w0.2: U1.2@12.452,9.828 12.452,9.603 12.702,9.353 12.702,9.349 13.652,8.399 14.623,8.399 v1(15.002,8.02) C2.1@14.85,8.02 ; C27.1@28.481,6.175 v1(28.481,7.56) ; v1(37.58,7.121) 37.586,7.121 Q2.3@37.624,7.159
  Bottom Layer w0.3: U1.4@13.102,7.578 C2.1@14.407,7.578
  Bottom Layer w0.5: C2.1@14.407,7.578 C2.1@14.85,8.02
V5_EN: R3.2 U1.6 U4.3 | length 22.4
  Top Layer w0.2: v1(20.54,11.418) 20.54,12.018 23.778,15.257 v1@23.778,16.561 ; v1(25.993,16.586) U4.3@25.993,17.735
  Bottom Layer w0.2: U1.6@11.802,7.578 11.802,6.763 12.907,5.659 12.907,5.559 13.091,5.744 R3.2@13.531,5.744 14.106,6.319 14.97,6.319 19.478,10.827 19.949,10.827 v1(20.54,11.418) ; v1@23.778,16.561 25.968,16.561 v1(25.993,16.586)
  other v1: 23.791,16.574
Vsys: C1.1 C7.1 L1.1 ON.2 U1.1 U3.5 | length 14.3
  Bottom Layer w0.2: L1.1@9.155,11.667 L1.1@9.785,12.296 ; C1.1@9.406,14.713 9.785,14.334 C1.1@9.785,14.182 ; U3.5@40.062,33.038 40.753,33.038 41.81,34.095 C7.1@41.962,34.095 v1(41.962,35.35) v1(41.962,36.463)
  Bottom Layer w0.3: U1.1@11.802,9.828 11.802,10.573
  Bottom Layer w0.5: v2(8.312,14.979) 8.83,14.461 8.83,14.39 ; v2(8.333,13.894) 8.83,14.39 ; L1.1@9.189,11.7 9.722,11.167 11.209,11.167 11.802,10.573 ; L1.1@9.785,12.296 C1.1@9.785,13.913 ; C1.1@9.785,14.182 9.577,14.39 8.83,14.39
Vusb: C3.1 C20.1 J2.A4 J2.A9 J2.B4 J2.B9 ON.3 U2.13 U4.42 | length 34.4
  Top Layer w0.2: 8.534,35.56 8.542,35.553 8.617,35.477 ; U4.42@27.993,28.918 27.993,32.77 v1@28.078,32.855
  Top Layer w0.5: ON.3@1.575,28.884 1.575,31.496 5.632,35.553 v2(6.855,35.553) v2(8.194,35.553) 8.542,35.553 9.57,35.553 v1(9.577,35.56)
  Bottom Layer w0.2: C3.1@6.96,25.441 8.435,25.441 8.692,25.699 U2.13@9.016,25.699 ; J2.A9@24.948,35.453 25.64,34.761 27.901,34.761 28.078,34.584 v1(28.078,32.83) C20.1@28.078,31.805
  Bottom Layer w0.5: ON.3@1.575,28.949 2.661,28.949 5.979,25.631 6.77,25.631 C3.1@6.96,25.441 ; J2.A9@24.948,35.453 J2.B4@24.948,36.803 ; J2.A4@29.198,35.453 J2.B9@29.198,36.803
pads on no net: J2.A8 J2.B8 U2.14 U2.15 U4.1 U5.5
copper on no net: | length 4.5
  Bottom Layer w0.254: 41.282,5.69 41.282,4.293 41.619,3.955 44.283,3.955

## Polygon pours and split planes (outlines as drawn)
V3.3 on Layer 1 (split plane): 51.459,41.376 51.409,41.176 51.379,40.973 51.369,40.767 51.379,40.561 51.409,40.358 51.459,40.158 51.529,39.964 51.617,39.778 51.723,39.601 51.845,39.436 51.983,39.283 52.136,39.145 52.301,39.023 52.478,38.917 52.664,38.829 52.858,38.759 53.058,38.709 53.261,38.679 53.467,38.669 53.673,38.679 53.876,38.709 54.076,38.759 54.1,38.768 54.1,3.142 54.076,3.151 53.876,3.201 53.673,3.231 53.467,3.241 53.261,3.231 53.058,3.201 52.858,3.151 52.664,3.081 52.478,2.993 52.301,2.887 52.136,2.765 51.983,2.627 51.845,2.474 51.723,2.309 51.617,2.132 51.529,1.946 51.459,1.752 51.409,1.552 51.379,1.349 51.369,1.143 51.379,0.937 51.409,0.734 51.459,0.534 51.46,0.531 38.689,0.531 38.689,1.419 38.689,5.614 38.689,9.908 38.684,9.932 38.67,9.953 38.649,9.967 38.624,9.972 27.431,9.972 27.407,9.967 27.386,9.953 27.372,9.932 27.367,9.908 27.367,2.486 16.142,2.486 16.142,9.003 16.137,9.028 16.123,9.049 16.102,9.063 16.077,9.068 11.718,9.068 11.694,9.063 11.673,9.049 11.659,9.028 11.654,9.003 11.654,0.531 3.15,0.531 3.151,0.534 3.201,0.734 3.231,0.937 3.241,1.143 3.231,1.349 3.201,1.552 3.151,1.752 3.081,1.946 2.993,2.132 2.887,2.309 2.765,2.474 2.627,2.627 2.474,2.765 2.309,2.887 2.132,2.993 1.946,3.081 1.752,3.151 1.552,3.201 1.349,3.231 1.143,3.241 0.937,3.231 0.734,3.201 0.534,3.151 0.531,3.15 0.531,9.41 10.855,9.41 10.88,9.415 10.901,9.429 10.915,9.45 10.92,9.475 10.92,16.143 10.915,16.168 10.901,16.189 10.88,16.203 10.855,16.208 6.233,16.208 6.233,33.246 30.783,33.246 30.808,33.251 30.829,33.265 30.843,33.286 30.848,33.311 30.848,37.97 37.158,37.97 37.158,32.162 37.163,32.137 37.177,32.116 37.198,32.102 37.223,32.097 43.002,32.097 43.027,32.102 43.048,32.116 43.062,32.137 43.067,32.162 43.067,41.379 51.46,41.379
Vsys on Layer 1 (split plane): 42.937,32.226 37.288,32.226 37.288,38.034 37.283,38.059 37.269,38.08 37.248,38.094 37.223,38.099 6.168,38.099 6.144,38.094 6.123,38.08 6.109,38.059 6.104,38.034 6.104,16.143 6.109,16.118 6.123,16.097 6.144,16.083 6.168,16.078 10.79,16.078 10.79,9.54 0.531,9.54 0.531,38.76 0.534,38.759 0.734,38.709 0.937,38.679 1.143,38.669 1.349,38.679 1.552,38.709 1.752,38.759 1.946,38.829 2.132,38.917 2.309,39.023 2.474,39.145 2.627,39.283 2.765,39.436 2.887,39.601 2.993,39.778 3.081,39.964 3.151,40.158 3.201,40.358 3.231,40.561 3.241,40.767 3.231,40.973 3.201,41.176 3.151,41.376 3.15,41.379 42.937,41.379
V5 on Layer 1 (split plane): 38.56,5.614 38.56,1.419 38.56,0.531 11.783,0.531 11.783,8.938 16.012,8.938 16.012,2.421 16.017,2.396 16.031,2.375 16.052,2.361 16.077,2.356 27.431,2.356 27.456,2.361 27.477,2.375 27.491,2.396 27.496,2.421 27.496,9.843 38.56,9.843
Vusb on Layer 1 (split plane): 30.718,33.376 6.233,33.376 6.233,37.97 30.718,37.97
GND on Layer 2 (split plane): 51.459,41.376 51.409,41.176 51.379,40.973 51.369,40.767 51.379,40.561 51.409,40.358 51.459,40.158 51.529,39.964 51.617,39.778 51.723,39.601 51.845,39.436 51.983,39.283 52.136,39.145 52.301,39.023 52.478,38.917 52.664,38.829 52.858,38.759 53.058,38.709 53.261,38.679 53.467,38.669 53.673,38.679 53.876,38.709 54.076,38.759 54.1,38.768 54.1,3.142 54.076,3.151 53.876,3.201 53.673,3.231 53.467,3.241 53.261,3.231 53.058,3.201 52.858,3.151 52.664,3.081 52.478,2.993 52.301,2.887 52.136,2.765 51.983,2.627 51.845,2.474 51.723,2.309 51.617,2.132 51.529,1.946 51.459,1.752 51.409,1.552 51.379,1.349 51.369,1.143 51.379,0.937 51.409,0.734 51.459,0.534 51.46,0.531 3.15,0.531 3.151,0.534 3.201,0.734 3.231,0.937 3.241,1.143 3.231,1.349 3.201,1.552 3.151,1.752 3.081,1.946 2.993,2.132 2.887,2.309 2.765,2.474 2.627,2.627 2.474,2.765 2.309,2.887 2.132,2.993 1.946,3.081 1.752,3.151 1.552,3.201 1.349,3.231 1.143,3.241 0.937,3.231 0.734,3.201 0.534,3.151 0.531,3.15 0.531,38.76 0.534,38.759 0.734,38.709 0.937,38.679 1.143,38.669 1.349,38.679 1.552,38.709 1.752,38.759 1.946,38.829 2.132,38.917 2.309,39.023 2.474,39.145 2.627,39.283 2.765,39.436 2.887,39.601 2.993,39.778 3.081,39.964 3.151,40.158 3.201,40.358 3.231,40.561 3.241,40.767 3.231,40.973 3.201,41.176 3.151,41.376 3.15,41.379 51.46,41.379

## Keep-outs
Keep-Out Layer:
  lines w0.127: 52.344,0.02 cw(c53.467,1.143) 54.59,2.266 ; 52.383,0.02 2.266,0.02 ccw(c1.143,1.143) 0.02,2.266 0.02,39.644 ccw(c1.143,40.767) 2.266,41.89 52.344,41.89 ccw(c53.467,40.767) 54.59,39.644 54.61,39.644 54.61,2.211
  lines w0.254: 0.02,36.861 ccw(c1.143,40.767) 5.049,41.89 ; 0.084,5.07 cw(c1.206,1.165) 5.112,0.042 ; 49.561,0.02 cw(c53.467,1.143) 54.59,5.049 ; 49.65,41.884 ccw(c53.556,40.761) 54.679,36.856

## Other copper
Layer 1 (plane layer: these items are gaps in the copper):
  lines w0.127: 0.02,9.475 10.855,9.475 10.855,16.143 6.168,16.143 6.168,38.034 37.223,38.034 37.223,32.162 43.002,32.162 43.002,41.89 ; 6.168,33.311 30.783,33.311 30.783,38.034 ; 11.718,0.276 11.718,9.003 16.077,9.003 16.077,2.421 27.431,2.421 27.431,9.908 38.624,9.908 38.624,5.614 38.624,1.419 38.624,0.02 37.226,0.02 33.031,0.02

## Silkscreen, mask and mechanical layers (free items; w line width, h text height)
Top Overlay:
  lines w0.254: 11.278,35.953 12.278,35.953 ; 11.76,35.437 11.76,36.437 ; 17.478,35.991 18.478,35.991 ; 4.623,6.466 10.781,6.466 10.781,9.048 4.623,9.048 4.623,6.466
  text "USB" at 0.629,32.779 h1.25
  text "BATT" at 0.338,19.029 h1.25
  text "rev1" at 4.653,6.763 h1.25
Bottom Overlay:
  text "PB3" at 24.713,26.978 h1
  text "PB10" at 31.708,26.489 h1
  text "PB4" at 31.793,21.294 h1
  text "PC15" at 25.515,12.951 h1
Board:
  lines w0.254: 0,0 54.61,0 54.61,41.91 0,41.91 0,0